# Altium PCB baseboard.PcbDoc
Units mil, origin at the board's own origin, x right, y up, seen from the top; angles counter-clockwise.
Board outline 3049.64 x 2909.31 mil, 2 copper layers (Top Layer, Bottom Layer); 26 components, 40 nets, 240 pads, 27 vias.
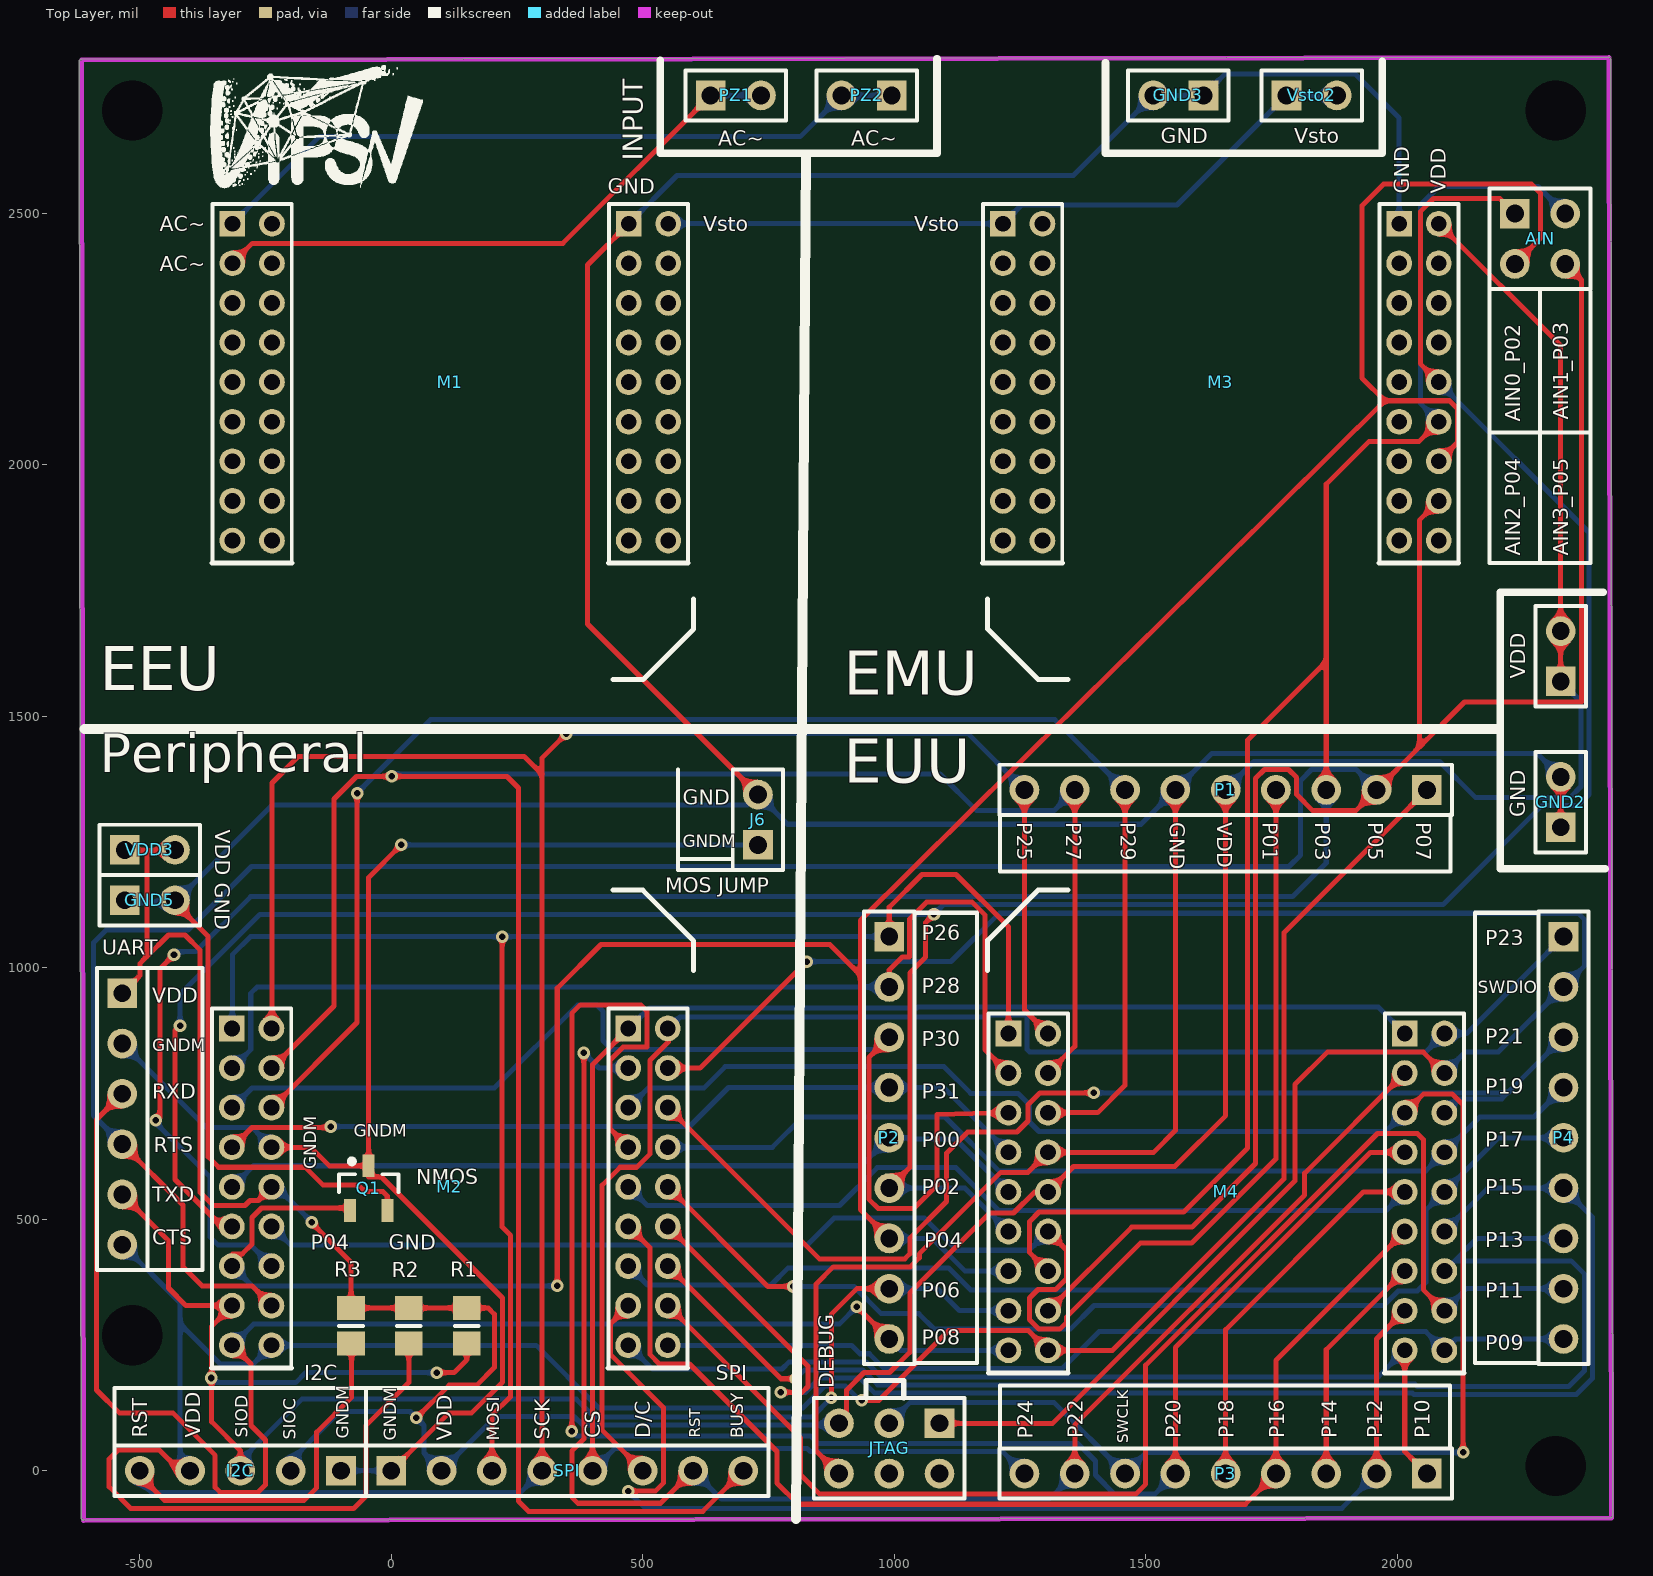
[diagram p0: Top Layer view]
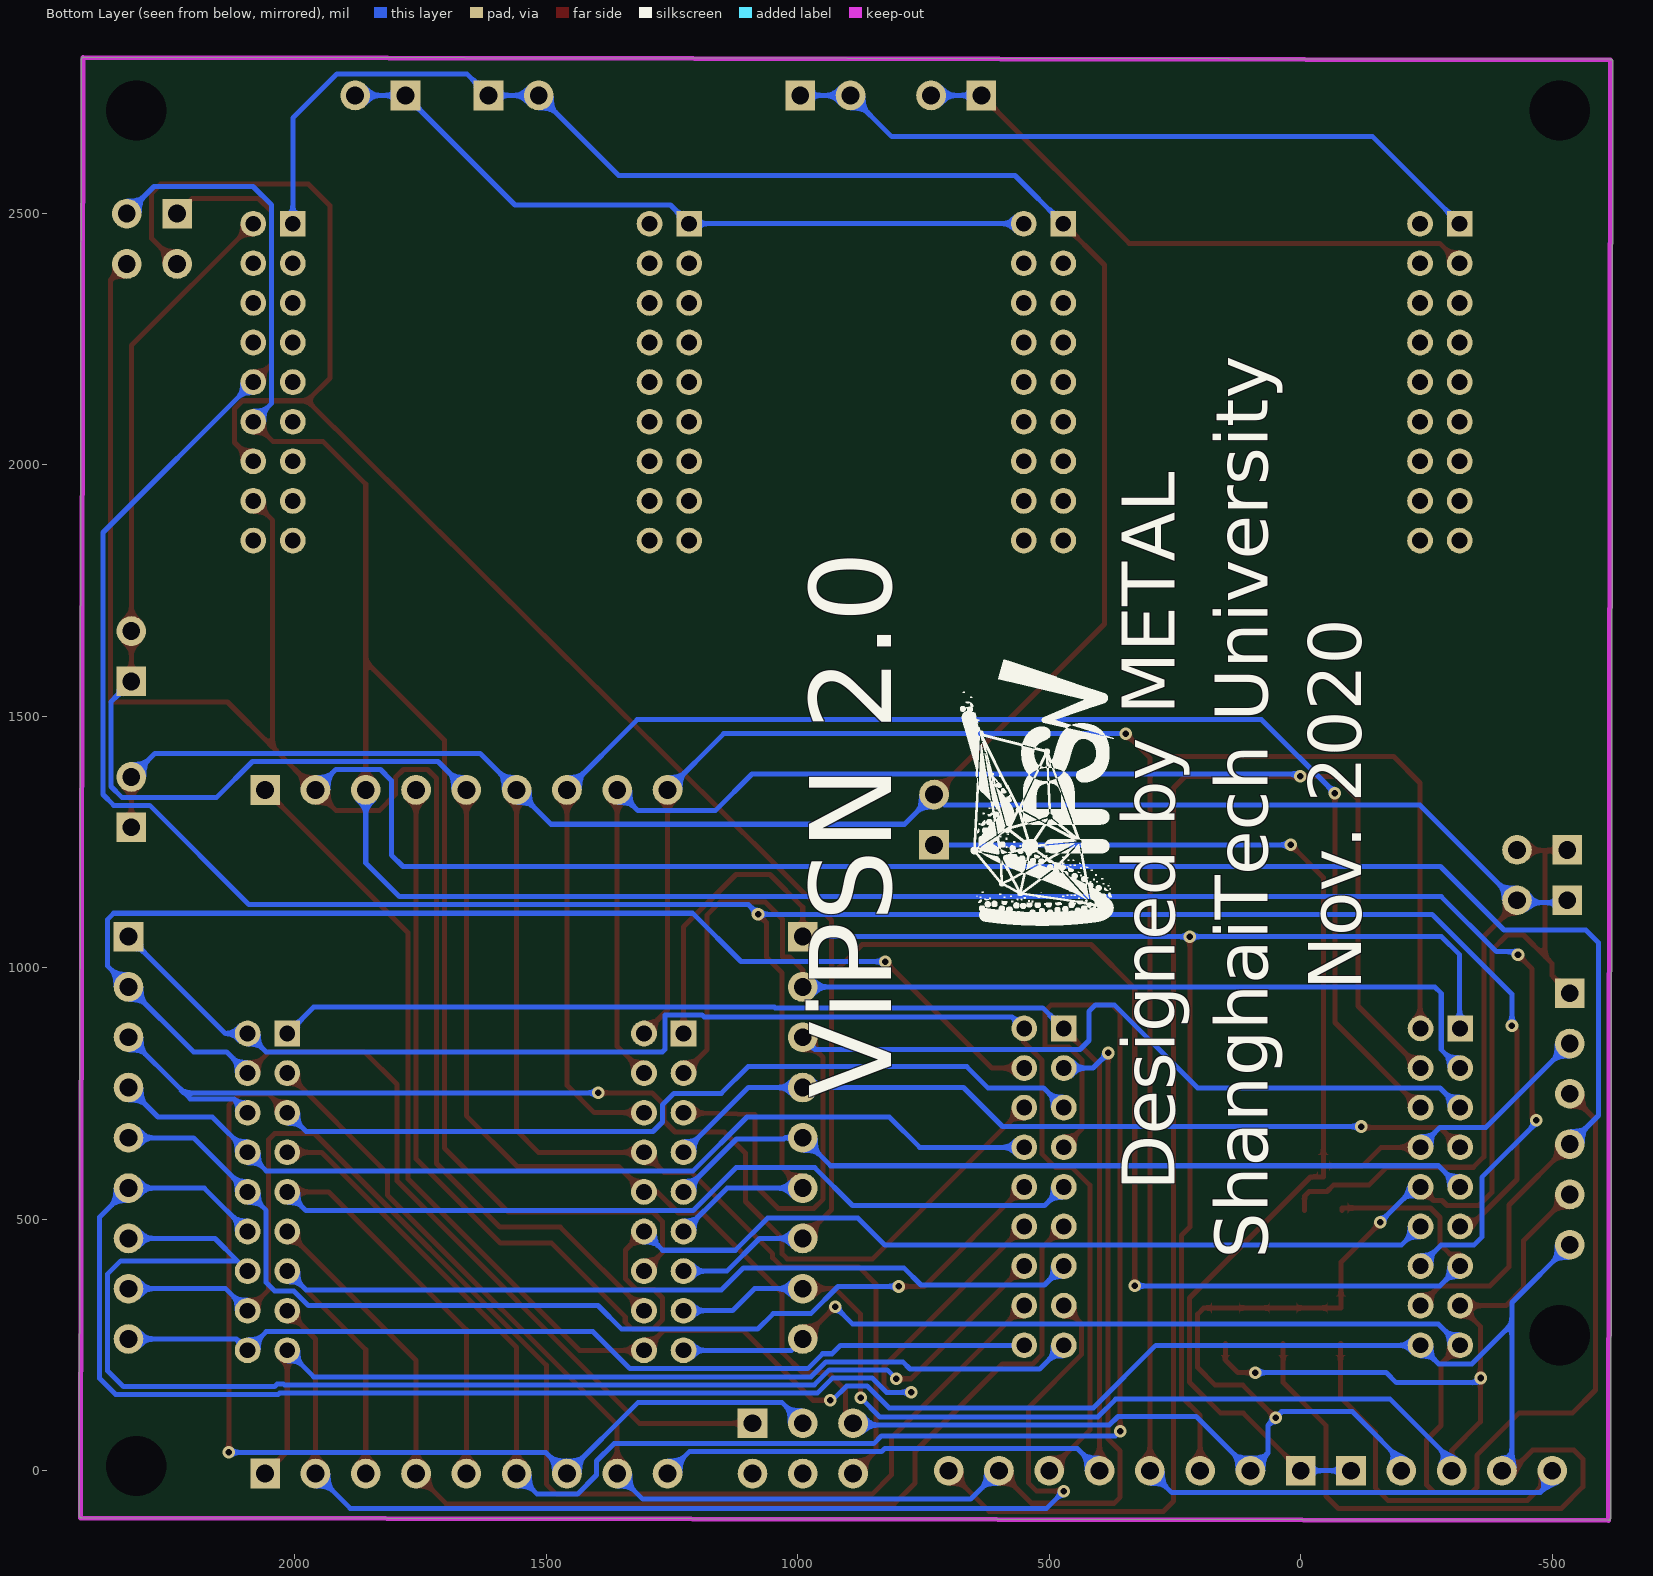
[diagram p1: Bottom Layer view, seen from below]

## Layer stack, top to bottom
Top Solder: solder mask 0.4, Solder Resist, Dk 3.5
Top Layer: signal copper 1.4
Dielectric 1: dielectric 12.6, FR-4, Dk 4.8
Bottom Layer: signal copper 1.4
Bottom Solder: solder mask 0.4, Solder Resist, Dk 3.5

## Board outline
-616.18,-93.75 -620.72,2799.24 cw(c-615.71,2799.25) -620.67,2800 cw(c-615.71,2800.77) -615.72,2805.78 2419.34,2810.56 cw(c2419.35,2805.54) 2424.37,2805.55 cw(c2419.35,2805.54) 2424.37,2805.54 2424.37,2805.55 2428.92,-88.96 cw(c2423.9,-88.97) 2428.92,-88.97 cw(c2423.9,-88.97) 2423.91,-93.99 -609.99,-98.76 cw(c-610,-93.74) -610.58,-98.73 cw(c-611.16,-93.74)

## Design rules (kind name [scope] priority, off if disabled: settings)
Clearance [All] p1: gap=6 ignorepadtopadclearanceinfootprint=FALSE
PolygonConnect [All] p1: connectstyle=Relief reliefconductorwidth=10 reliefentries=4 polygonreliefangle="90 Angle" airgapwidth=10
RoutingVias [All] p1: holewidth=13 width=25 viastyle="Through Hole" minholewidth=13 minwidth=25 maxholewidth=13 maxwidth=25
SolderMaskExpansion [All] p1: expansion=4
Width [All] p1: maxlimit=10 minlimit=10 preferedwidth=10
30 further rules are at their usual default settings.

## Components (designator, comment, footprint, x,y, rotation, side; value= is the part's Value field where it differs from the comment)
AIN "Header 2X2" HDR2X2 2233.94,2499.26 r270 top
GND2 "Header 2" HDR1X2 2325,1279.26 r90 top
GND3 "Header 2" HDR1X2 1615,2734.26 r180 top
GND5 "Header 2" HDR1X2 -530,1134.26 r0 top
I2C "Header 5" HDR1X5 -100,0 r180 top
J6 "Mos" HDR1X2 728.94,1244.26 r90 top
JTAG "Header 3X2" HDR2X3 1090,94.26 r180 top
M1 "MHDR2X18" module9x4 -315,1849.26 r0 top
M2 "MHDR2X18" module9x4 -316,249.26 r0 top
M3 "MHDR2X18" module9x4 1216.93,1849.26 r0 top
M4 "MHDR2X18" module9x4 1227.99,239.22 r0 top
P1 "Header 9" HDR1X9 2058.94,1353.52 r180 top
P2 "Header 9" HDR1X9 990.09,1061.82 r270 top
P3 "Header 9" HDR1X9 2058.94,-5.74 r180 top
P4 "Header 9" HDR1X9 2330.64,1061.82 r270 top
PZ1 "Header 2" HDR1X2 635,2734.26 r0 top
PZ2 "Header 2" HDR1X2 995,2734.26 r180 top
Q1 "mos" SOT23_N -45,561.82 r90 top
R1 "Res1" res 150,318.04 r270 top value=10k
R2 "Res1" res 35,318.04 r270 top value=10k
R3 "Res1" res -80,318.04 r270 top value=10k
SPI "Header 8" HDR1X8 0,0 r0 top
UART "MHDR1X6" HDR1X6 -535,949.26 r270 top
VDD "Header 2" HDR1X2 2325,1569.26 r90 top
VDD3 "Header 2" HDR1X2 -530,1234.26 r0 top
Vsto2 "Header 2" HDR1X2 1780,2734.26 r0 top

## Footprints (in the part's own frame and the unit in brackets; to place one, negate y for a bottom-side part, rotate by r counter-clockwise, add the part's x,y. Pads: shape width x height; smd on the part's side, far side on the other; paste and mask are expansions set on the pad)
HDR1X2 [mm] "Connector; Header; 2 Position"
  rect 1.5x1.5 hole 0.9: 1(0,0)
  round 1.5 hole 0.9: 2(2.54,0)
  silkscreen extent -1.27,-1.27 3.81,1.27
HDR1X5 [mm] "Connector; Header; 5 Position"
  rect 1.5x1.5 hole 0.9: 1(0,0)
  round 1.5 hole 0.9: 2(2.54,0) 3(5.08,0) 4(7.62,0) 5(10.16,0)
  silkscreen extent -1.27,-1.27 11.43,1.27
HDR1X6 [mm] "Connector; Header; 6 Position"
  rect 1.5x1.5 hole 0.9: 1(0,0)
  round 1.5 hole 0.9: 2(2.54,0) 3(5.08,0) 4(7.62,0) 5(10.16,0) 6(12.7,0)
  silkscreen extent -1.27,-1.27 13.97,1.27
HDR1X8 [mm] "Connector; Header; 8 Position"
  rect 1.5x1.5 hole 0.9: 1(0,0)
  round 1.5 hole 0.9: 2(2.54,0) 3(5.08,0) 4(7.62,0) 5(10.16,0) 6(12.7,0) 7(15.24,0) 8(17.78,0)
  silkscreen extent -1.27,-1.27 19.05,1.27
HDR1X9 [mm] "Connector; Header; 9 Position"
  rect 1.5x1.5 hole 0.9: 1(0,0)
  round 1.5 hole 0.9: 2(2.54,0) 3(5.08,0) 4(7.62,0) 5(10.16,0) 6(12.7,0) 7(15.24,0) 8(17.78,0) 9(20.32,0)
  silkscreen extent -1.27,-1.27 21.59,1.27
HDR2X2 [mm] "Connector; Header; 2x2 Position"
  rect 1.5x1.5 hole 0.9: 1(0,0)
  round 1.5 hole 0.9: 2(0,2.54) 3(2.54,0) 4(2.54,2.54)
  silkscreen extent -1.27,-1.27 3.81,3.81
HDR2X3 [mm] "Connector; Header; 3x2 Position"
  rect 1.5x1.5 hole 0.9: 1(0,0)
  round 1.5 hole 0.9: 2(0,2.54) 3(2.54,0) 4(2.54,2.54) 5(5.08,0) 6(5.08,2.54)
  silkscreen extent -1.27,-1.27 6.35,3.81
module9x4 [mm]
  rect 1.3x1.3 hole 0.8: 1(-0.025,16.002) 36(19.99,16.002)
  round 1.3 hole 0.8: 2(21.99,16.002) 3(-0.025,14.002) 4(21.99,14.002) 5(-0.025,12.002) 6(21.99,12.002) 7(-0.025,10.002) 8(21.99,10.002) 9(-0.025,8.002) 10(21.99,8.002) 11(-0.025,6.002) 12(21.99,6.002) 13(-0.025,4.002) 14(21.99,4.002) 15(-0.025,2.002) 16(21.99,2.002) 17(-0.025,0.002) 18(21.99,0.002) 19(1.975,0.002) 20(19.99,0.002) 21(1.975,2.002) 22(19.99,2.002) 23(1.975,4.002) 24(19.99,4.002) 25(1.975,6.002) 26(19.99,6.002) 27(1.975,8.002) 28(19.99,8.002) 29(1.975,10.002) 30(19.99,10.002) 31(1.975,12.002) 32(19.99,12.002) 33(1.975,14.002) 34(19.99,14.002) 35(1.975,16.002)
  silkscreen extent -1.04,-1.14 22.99,17
res [mm]
  rect 1.2x1.4 smd: 1(1.662,0) 2(-0.138,0)
  silkscreen extent 0.76,-0.6 0.76,0.6, body extent -0.31,-0.7 1.84,0.7, height 0.7
SOT23_N [mm] "SOT23, 3-Leads, Body 2.9x1.3mm, Pitch 0.95mm, Lead Span 2.3mm - Reverse Pinning, IPC Medium Density"
  rect 1.15x0.6 smd: 1(1.125,0) 2(-1.125,-0.95) 3(-1.125,0.95)
  silkscreen extent -0.2,-1.5 1.47,1.5, body extent -0.7,-1.5 0.7,1.5, height 1.1

## Part data
AIN: "Header, 2-Pin, Dual row", LatestRevisionDate=17-Jul-2002, LatestRevisionNote="Re-released for DXP Platform.", Publisher="Altium Limited"
GND2 GND3 GND5 PZ1 PZ2 VDD VDD3 Vsto2: "Header, 2-Pin", LatestRevisionDate=17-Jul-2002, LatestRevisionNote="Re-released for DXP Platform.", Publisher="Altium Limited"
I2C: "Header, 5-Pin", LatestRevisionDate=17-Jul-2002, LatestRevisionNote="Re-released for DXP Platform.", Publisher="Altium Limited"
J6: library part "Header 2", "Header, 2-Pin", LatestRevisionDate=17-Jul-2002, LatestRevisionNote="Re-released for DXP Platform.", Publisher="Altium Limited"
JTAG: "Header, 3-Pin, Dual row", LatestRevisionDate=17-Jul-2002, LatestRevisionNote="Re-released for DXP Platform.", Publisher="Altium Limited"
M1 M2 M3 M4: "Header, 18-Pin, Dual row", LatestRevisionDate=17-Jul-2002, LatestRevisionNote="Re-released for DXP Platform.", Publisher="Altium Limited"
P1 P2 P3 P4: "Header, 9-Pin", LatestRevisionDate=17-Jul-2002, LatestRevisionNote="Re-released for DXP Platform.", Publisher="Altium Limited"
Q1: library part MOSFET-N, "N-Channel MOSFET", LatestRevisionDate=17-Jul-2002, LatestRevisionNote="Re-released for DXP Platform.", PackageDescription="TO, Flat Index; 3 In-Line, Axial Leads; Body Dia. 4.6mm; Lead Dia. 0.5 mm (max)", PackageReference=E3, PackageVersion=1995/1996, Published=8-Jun-2000, Publisher="Altium Limited"
R1 R2 R3: "Resistor", LatestRevisionDate=17-Jul-2002, LatestRevisionNote="Re-released for DXP Platform.", PackageDescription="Axial Device, Thru-Hole; 2 Leads; 0.3 in Pin Spacing", PackageReference=AXIAL-0.3, Published=8-Jun-2000, Publisher="Altium Limited"
SPI: "Header, 8-Pin", LatestRevisionDate=17-Jul-2002, LatestRevisionNote="Re-released for DXP Platform.", Publisher="Altium Limited"
UART: "Header, 6-Pin", LatestRevisionDate=17-Jul-2002, LatestRevisionNote="Re-released for DXP Platform.", Publisher="Altium Limited"

## Free pads (board coordinates)
  round 60 hole 120: 0(-515,269.26) 0(-515,2704.26) 0(2315,9.26) 0(2315,2704.26)

## Via types
v1: diameter 25, hole 13, Top Layer to Bottom Layer, 27 vias

## Nets (pads, with @x,y where several pads share a name; then routed paths per layer and width w, separated by ;. In a path a pad name is that pad's centre, name@x,y a point inside that pad or via, vN(x,y) a via of type N, cw(c..) or ccw(c..) an arc to the next point about the centre after c; other vN are vias at no path point)
D: I2C.1 J6.1 M2.29 Q1.1 SPI.1 UART.2 | length 2933.8
  Top Layer w10: M2.29@-237.26,643 -160,643 -123.11,606.11 Q1.1 ; SPI.1 114.26,114.26 159.26,114.26 221,176 221,343.26 -19.59,583.85 -45,583.85 Q1.1 ; v1(20,1244.26) -45,1179.26 Q1.1
  Bottom Layer w10: UART.2 -368.48,682.74 -277,682.74 M2.29@-237.26,643 ; I2C.1@-120,0 SPI.1 ; v1(20,1244.26) J6.1
G: AIN.3 M2.13 M3.14 M4.13 P2.7 Q1.3 | length 5857.7
  Top Layer w10: M2.13@-316,406.78 -316,431.26 -296,431.26 -277,450.26 -277,503.26 -258,522.26 -82.4,522.26 Q1.3 ; v1(330,367.26) 330,959.26 417,1046.26 872,1046.26 933,985.26 ; P2.7 933,518.91 933,985.26 ; M3.14 2120,2044.14 2120,2111.26 2104,2127.26 1975,2127.26 ; AIN.3 2285,2450.32 2285,2540 2266.74,2558.26 1973.26,2558.26 1930,2515 1930,2172.26 1975,2127.26 ; 933,985.26 933,1094.26 1975,2127.26
  Bottom Layer w10: M2.13@-316,406.78 -276.48,367.26 v1(330,367.26) ; P2.7 1076,461.82 1141.04,396.78 M4.13
GND: GND2.1 GND2.2 GND3.1 GND3.2 GND5.1 GND5.2 J6.2 JTAG.6 M1.36 M3.36 M4.29 P1.6 Q1.2 | length 9226.9
  Top Layer w10: GND5.2@-431.06,1129.26 -364,1062.2 -364,624 -343.26,603.26 -171,603.26 -135.42,567.68 -64.76,567.68 -52.09,555 -16.75,555 -7.6,545.85 Q1.2 ; M1.36 390,2397.25 390,1683.2 J6.2 ; JTAG.6 844.47,39.79 844.47,370.73 879.03,405.29 1032,405.29 1049.88,423.17 1049.88,431.14 1212,593.26 1265.99,593.26 M4.29 1515.68,633 1558.94,676.26 P1.6 ; GND2.1 GND2.2
  Bottom Layer w10: GND5.1@-531.06,1129.26 -431.06,1129.26 -237.18,1323.14 707.82,1323.14 J6.2 787.94,1285.26 1490.68,1285.26 P1.6 1631.47,1426.05 2278.21,1426.05 GND2.2 ; M1.36 568.01,2575.26 1356,2575.26 GND3.2 GND3.1 1658,2777.26 1916,2777.26 2003.94,2689.32 M3.36
NFC1_P0.09: M2.18 M4.18 P4.9 | length 1854.3
  Bottom Layer w10: M2.18@550.75,249.3 915,249.3 931.8,232.5 950.42,232.5 980.21,202.71 1333.45,202.71 1407,276.26 2056.78,276.26 M4.18 2116.26,261.82 P4.9
NFC2_P0.10: M2.20 M4.20 P3.1 | length 1865.7
  Top Layer w10: M4.20 2015,38.2 P3.1
  Bottom Layer w10: M2.20@472.01,249.3 519.05,202.26 776.97,202.26 791.21,216.5 943.79,216.5 973.58,186.71 1962.41,186.71 M4.20
P0.02: AIN.1 M2.11 M3.10 M4.11 P2.6 | length 5853.9
  Top Layer w10: v1(-420,885) -430,875 -430,578.89 -336.67,485.56 M2.11 ; M2.11@-316.52,486.04 M2.11@-316,485.52 ; P2.6 1031,602.73 1031,989.67 1062.62,1021.29 1062.62,1089.88 v1(1079,1106.26) ; M3.10 2046,2200.98 2046,2503.26 2072,2529.26 2203.94,2529.26 AIN.1
  Bottom Layer w10: v1(-420,885) -420,947.26 -261,1106.26 v1(1079,1106.26) 1098,1125.26 2091,1125.26 2288.47,1322.73 2360,1322.73 2381.53,1344.26 2381.53,1865.45 M3.10 ; P2.6 1140.69,561.82 M4.11
P0.03: AIN.2 M2.23 M3.12 M4.23 P1.3 | length 6573.9
  Top Layer w10: v1(-468,697) -460,705 -460,997.82 v1(-432,1025.82) ; M4.23 1269.14,433.37 1269.14,495.4 1288,514.26 1575.43,514.26 1702.41,641.24 1702.41,1452.41 1858.94,1608.94 ; P1.3 1858.94,1608.94 ; M3.12 2043,2045.88 1943.62,2045.88 1858.94,1961.2 1858.94,1608.94
  Bottom Layer w10: v1@-472,695.26 -360,583.26 -360,464.26 -344,448.26 -278.74,448.26 M2.23@-237.26,406.78 ; v1(-432,1025.82) -425.78,1032.04 -388.87,1032.04 -279.65,1141.26 1792,1141.26 1858.94,1208.2 P1.3 ; M3.12 2046,2122.24 2046,2516.26 2083,2553.26 2279.94,2553.26 AIN.2
P0.05: AIN.4 M2.21 M3.16 M4.21 P1.2 UART.4 | length 7211.5
  Top Layer w10: UART.4 -414,528.26 -414,405.26 -376,367.26 -276.48,367.26 M2.21@-237.26,328.04 ; M4.21 1471.95,484.26 1592,484.26 1718.41,610.67 1718.41,1376.46 1736,1394.05 1784,1394.05 1800,1378.05 1800,1344.26 1832,1312.26 1917.68,1312.26 P1.2 2044,1438.58 ; M3.16 2044,1889.4 2044,1438.58 ; AIN.4 2366,2367.2 2366,1528.26 2133.68,1528.26 2044,1438.58
  Bottom Layer w10: UART.4 -592,706.26 -592,1049.82 -566.82,1075 -404.26,1075 -278,1201.26 1785,1201.26 1808,1224.26 1808,1372.26 1829.79,1394.05 1918.41,1394.05 P1.2
P0.06: I2C.3 M2.15 M4.15 P2.8 R1.1 UART.5 | length 3141.6
  Top Layer w10: UART.5 -443,457.26 -443,363.04 -408,328.04 -316,328.04 -357,287.04 -357,97 -300,40 I2C.3 ; v1(90,195) 125,195 150,220 R1.1 ; v1(875,145) 875,311.26 925.56,361.82 P2.8
  Bottom Layer w10: v1@-360,185 -350,175 -190,175 -170,195 v1(90,195) ; I2C.3@-320,0 -177.74,142.26 367.82,142.26 403.32,106.76 836.76,106.76 v1(875,145) ; P2.8 1086,361.82 1129.78,318.04 M4.15
  other v1: -358,184.26
P0.07: I2C.4 M2.19 M4.19 P1.1 R2.1 UART.6 | length 5025
  Top Layer w10: I2C.4@-420,0 -461.26,41.26 -543,41.26 -561,23.26 -561,-32 -518,-75 -74.79,-75 -50,-50.21 -50,90.26 35,175.26 R2.1 ; v1(935,140) 969.74,140 1108,278.26 1266.77,278.26 M4.19 1434,239.3 1775,580.3 1775,1069.58 P1.1
  Bottom Layer w10: UART.6 -420,334.26 -420,292.26 ; I2C.4@-420,0 -420,292.26 ; v1(935,140) 931.26,140 902.76,168.5 862.12,168.5 818.7,125.08 412.18,125.08 287.96,249.3 -237.26,249.3 -274.3,212.26 -340,212.26 -420,292.26
P0.08: M2.17 M4.17 P2.9 UART.3 | length 2989.3
  Top Layer w10: UART.3 -586,698.26 -586,160.26 -540,114.26 -433.68,114.26 -350,30.58 -350,-33 -340,-43 -265,-43 -250,-28 -250,61 -279,90 -279,212.3 M2.17@-316,249.3 ; v1(925.65,326.26) P2.9
  Bottom Layer w10: M2.17@-316,249.3 -274.04,291.26 890.65,291.26 v1(925.65,326.26) ; P2.9 1012.61,239.3 M4.17
P0.11: M2.16 M4.16 P4.8 | length 2752.5
  Top Layer w10: M2.16@550.75,328.04 814,64.79 814,-8.74 852,-46.74 1480,-46.74 1500,-26.74 1500,209.63 1960.63,670.26 2040,670.26 2052,658.26 2052,359.78 M4.16
  Bottom Layer w10: M4.16 2137.52,361.82 P4.8
P0.12: M2.22 M4.22 P3.2 | length 2365.9
  Top Layer w10: v1(471,-40.74) 525,-40.74 541,-24.74 541,125.68 435.42,231.26 435.42,291.45 M2.22@472.01,328.04 ; P3.2 1958.94,261.98 M4.22
  Bottom Layer w10: v1(471,-40.74) 505,-74.74 1889.94,-74.74 P3.2
P0.13: M2.14 M4.14 P4.7 | length 2674.4
  Top Layer w10: M2.14@550.75,406.78 774.77,182.76 v1(804.47,182.76)
  Bottom Layer w10: v1(804.47,182.76) 822.21,200.5 937.16,200.5 966.95,170.71 2020.82,170.71 2022.06,171.95 2035.31,171.95 2040,167.26 2341,167.26 2372,198.26 2372,391.26 2346,417.26 2114.22,417.26 ; M4.14 2114.22,417.26 ; P4.7 2158.78,461.82 2114.22,417.26
P0.14: M2.24 M4.24 P3.3 | length 2073.5
  Top Layer w10: P3.3 1858.94,240.72 M4.24
  Bottom Layer w10: M2.24@472.01,406.78 509.53,369.26 755,369.26 789,403.26 1108,403.26 1152,359.26 1977.48,359.26 M4.24
P0.15: M2.12 M4.12 P4.6 | length 2820.3
  Top Layer w10: M2.12@550.75,485.52 828.47,207.8 828.47,167.26 817.07,155.86 v1(774,155.86)
  Bottom Layer w10: v1(774,155.86) 823.7,155.86 852.34,184.5 930.53,184.5 960.33,154.71 2029.92,154.71 2033.37,151.26 2356,151.26 2388,183.26 2388,504.46 P4.6 2180.04,561.82 M4.12
P0.16: M2.26 M4.26 P3.4 | length 2289.5
  Top Layer w10: M2.26@472.01,485.52 514,443.53 514,231.26 533,212.26 593,212.26 767,38.26 767,-24.74 809,-66.74 1697.94,-66.74 P3.4 1758.94,219.46 M4.26
P0.17: M2.10 M4.10 P4.5 | length 2138.7
  Top Layer w10: M2.10@550.75,564.26 748.75,366.26 v1(799,366.26)
  Bottom Layer w10: v1(799,366.26) 920,366.26 974,312.26 1049,312.26 1080,281.26 1350,281.26 1397,328.26 1973,328.26 2002,357.26 2040,357.26 2057,374.26 2057,517.52 M4.10 2201.3,661.82 P4.5
P0.18: M2.28 M4.28 P3.5 | length 2395.7
  Top Layer w10: P3.5 1658.94,280.49 1932.71,554.26 M4.28
  Bottom Layer w10: M2.28@472.01,564.26 509.01,527.26 891,527.26 966.09,602.35 1122.91,602.35 1208,517.26 1978,517.26 M4.28
P0.19: M2.8 M4.8 P4.4 | length 1917.7
  Bottom Layer w10: M2.8@550.75,643 757.74,643 818,703.26 1101,703.26 1208,596.26 2057,596.26 M4.8 2164,703.26 2272.08,703.26 P4.4
P0.20: M2.30 M4.30 P3.6 | length 3489.7
  Top Layer w10: v1(359,78.26) 359,909.26 376,926.26 496,926.26 508.6,913.66 508.6,842.26 461,842.26 435,816.26 435,680.01 M2.30@472.01,643 ; P3.6 1558.94,244.83 1947.11,633 M4.30
  Bottom Layer w10: v1(359,78.26) 368,69.26 833.47,69.26 849,53.73 1365.53,53.73 1400,19.26 1400,-8.74 1438,-46.74 1517.94,-46.74 P3.6
P0.21: M2.6 M4.6 P4.3 | length 2322.7
  Top Layer w10: M2.6@550.75,721.74 851.2,421.29 1021.03,421.29 1031,431.26 1031,462.26 1104,535.26 1104,631.26 1146,673.26 1244,673.26 1266,695.26 1266,727.26 1290,751.26 v1(1397,751.26)
  Bottom Layer w10: v1(1397,751.26) 2220.08,751.26 ; M4.6 2121.26,739.26 2208.08,739.26 2220.08,751.26 ; P4.3 2220.08,751.26
P0.22: M2.34 M4.34 P3.8 SPI.7 | length 3138.9
  Top Layer w10: v1(383,830.48) 383,63.26 359,39.26 359,-52.74 371,-64.74 535.26,-64.74 SPI.7 ; P3.8 1358.94,91.2 1816,548.26 1816,591.48 M4.34
  Bottom Layer w10: v1(383,830.48) 413,800.48 M2.34@472.01,800.48 ; SPI.7 656.74,-56.74 1307.94,-56.74 P3.8
P0.23: M2.2 M4.2 P4.1 SPI.6 | length 2942.4
  Top Layer w10: SPI.6 419.42,80.58 419.42,567.68 455,603.26 488,603.26 514,629.26 514,815.48 550.75,852.23 M2.2@550.75,879.22
  Bottom Layer w10: M2.2@550.75,879.22 573.88,902.35 1186.54,902.35 1190,905.81 1264,905.81 1264,837.63 1269,832.63 2057.15,832.63 M4.2 2138.04,869.22 P4.1
P0.24: M2.36 M4.36 P3.9 SPI.5 | length 3389.4
  Top Layer w10: SPI.5 400,807.21 M2.36@472.01,879.22
  Bottom Layer w10: SPI.5 444.26,44.26 826.94,44.26 833.47,37.73 1215.47,37.73 P3.9 ; M2.36@472.01,879.22 513.05,920.26 1045.07,920.26 1046.62,921.81 1962.41,921.81 M4.36
P0.25: I2C.5 M2.35 M4.35 P1.9 R3.1 SPI.4 | length 5573.1
  Top Layer w10: I2C.5 -500,-10 -451,-59 -173.26,-59 -148.37,-34.11 -148.37,76.63 -79,146 -79,252.61 R3.1 ; M2.35@-237.26,879.22 -237.26,1367.26 -184.26,1420.26 264,1420.26 300,1384.26 ; SPI.4 300,1384.26 ; v1(348,1465.26) 300,1417.26 300,1384.26 ; P1.9 1258.94,916.01 M4.35
  Bottom Layer w10: I2C.5@-520,0 -476.26,-43.74 256.26,-43.74 SPI.4 ; v1(348,1465.26) 1147.2,1465.26 P1.9
P0.26: M2.1 M4.1 P2.1 SPI.3 | length 3128.9
  Top Layer w10: SPI.3 200,110 237,147 237,468 220.56,484.44 v1(220.56,1061.82) ; P2.1 990.09,1120.26 1055.09,1185.26 1123,1185.26 1226.99,1081.27 M4.1
  Bottom Layer w10: M2.1@-316,879.22 -316,1025.82 -280,1061.82 v1(220.56,1061.82) P2.1
P0.27: M2.33 M4.33 P1.8 SPI.8 | length 4880.1
  Top Layer w10: M2.33@-237.26,800.48 -114,923.74 -114,1335.26 -69,1380.26 v1(1,1380.26) 230,1380.26 253,1357.26 253,-60.74 273,-80.74 619.26,-80.74 SPI.8 ; M4.33 1358.94,843.69 P1.8
  Bottom Layer w10: v1(1,1380.26) 6,1385.26 1091,1385.26 1164,1312.26 1317.68,1312.26 P1.8
P0.28: M2.3 M4.3 P2.2 | length 2106.7
  Top Layer w10: P2.2 990.09,995.39 1016,1021.29 1030.62,1021.29 1030.62,1096.88 1064,1130.26 1155,1130.26 1180,1105.26 1180,837.47 M4.3
  Bottom Layer w10: M2.3@-316,800.48 -279.41,837.07 -279.41,949.07 -266.66,961.82 P2.2
P0.29: M2.31 M4.31 P1.7 | length 3104
  Top Layer w10: M2.31@-237.26,721.74 -68,891 v1(-68,1347.26) ; M4.31 1404.48,711.74 1458.94,766.2 P1.7
  Bottom Layer w10: v1(-68,1347.26) 78,1493.26 1319.2,1493.26 P1.7
P0.30: M2.5 M4.5 P2.3 | length 2255.8
  Top Layer w10: P2.3 949.57,821.29 949.57,539.73 968,521.29 1039.03,521.29 1085,567.26 1085,708.26 M4.5
  Bottom Layer w10: M2.5@-316,721.74 -277,760.74 205.02,760.74 370.5,926.22 408,926.22 421.04,913.18 421.04,855.26 439.04,837.26 965.53,837.26 P2.3
P0.31: M2.7 M4.7 P2.4 | length 1645.6
  Top Layer w10: M2.7@-316,643 -276.74,682.26 -122,682.26 v1(-120,684.26)
  Bottom Layer w10: v1(-120,684.26) 593,684.26 670.56,761.82 P2.4 1098.17,761.82 M4.7
PZ1: M1.3 PZ1.1 PZ1.2 | length 1189.2
  Top Layer w10: M1.3 -276.26,2440.26 341,2440.26 PZ1.1
  Bottom Layer w10: PZ1.1 PZ1.2
PZ2: M1.1 PZ2.1 PZ2.2 | length 1416.6
  Bottom Layer w10: M1.1 -143,2652.26 813,2652.26 PZ2.2 PZ2.1
SWCLK: JTAG.3 M2.32 M4.32 P3.7 | length 3731.1
  Top Layer w10: M4.32 2052.52,749.26 2109,749.26 2131,727.26 v1(2131,36.26)
  Bottom Layer w10: M2.32@472.01,721.74 511.53,761.26 622,761.26 664,803.26 1099,803.26 1152,750.26 1246,750.26 1269,727.26 1269,693.26 1288,674.26 1977.52,674.26 M4.32 ; JTAG.3 1031,135.26 1317.94,135.26 P3.7 1500.94,36.26 v1(2131,36.26)
SWDIO: JTAG.1 M2.4 M4.4 P4.2 | length 3852.3
  Top Layer w10: M2.4@550.75,800.48 614.22,800.48 v1(826,1012.26) ; JTAG.1 1315,94.26 1796.55,575.81 1796.55,767.81 1860.96,832.22 2052,832.22 M4.4
  Bottom Layer w10: v1(826,1012.26) 1113,1012.26 1209,1108.26 2360,1108.26 2372,1096.26 2372,1003.18 P4.2 2201.08,832.26 2135.52,832.26 M4.4
VDD: I2C.2 JTAG.5 M2.27 M3.2 M4.27 P1.5 R1.2 R2.2 R3.2 SPI.2 UART.1 VDD3.1 VDD3.2 VDD.1 VDD.2 | length 7158.3
  Top Layer w10: UART.1 -500,984.26 -500,1008 -486,1022 ; VDD3.1@-530,1233.2 -490,1233.2 ; VDD3.2@-430,1233.2 -490,1233.2 ; M2.27@-237.26,564.26 -264.26,537.26 -281,537.26 -291,527.26 -354,527.26 -380,553.26 -380,1035 -410,1065 -443,1065 -486,1022 ; v1@-155,490 -155,489.44 -80,414.44 R3.2 R2.2 R1.2 192.79,323.47 205,311.26 205,205 170,170 115,170 v1(50,105) ; JTAG.5 905,109.26 905,160 940,195 990.74,195 1031,235.26 1031,353.26 1190,512.26 1237.29,512.26 1279.29,554.26 M4.27 1356.28,604.81 1557.79,604.81 1658.94,705.95 P1.5 ; M3.2 2325,2236.94 VDD.2 VDD.1 ; -490,1233.2 -486,1229.2 -486,1022
  Bottom Layer w10: M2.27 -228.04,564.3 v1(-158,494.26) ; I2C.2@-220,0 -102.74,117.26 37.74,117.26 v1(50,105) 65,90 65,35 SPI.2 207.91,107.91 363.35,107.91 380.5,90.76 886.5,90.76 JTAG.5 ; P1.5 1715.47,1410.05 2084,1410.05 2155.32,1338.73 2344,1338.73 2365.53,1360.26 2365.53,1528.73 VDD.1
Vsto: M1.2 M3.1 Vsto2.1 Vsto2.2 | length 1434.9
  Bottom Layer w10: M1.2 M3.1 1252.93,2516.26 1562,2516.26 Vsto2.1 Vsto2.2
XL1_P0.00: M2.9 M4.9 P2.5 | length 1628
  Bottom Layer w10: M2.9@-316,564.26 -274,606.26 934.53,606.26 P2.5 1025.48,661.82 1027.71,659.59 1121.66,659.59 M4.9
XL2_P0.01: M2.25 M4.25 P1.4 | length 3241.9
  Top Layer w10: M4.25 1342.32,438.93 1342.32,381.62 1320.89,360.19 1285.93,360.19 1269,343.26 1269,300.26 1288,281.26 1329,281.26 1343,295.26 1343,305.96 1489.3,452.26 1591,452.26 1758.94,620.2 P1.4
  Bottom Layer w10: M2.25@-237.26,485.52 -200,448.26 826.37,448.26 880.46,502.35 1059.91,502.35 1124,438.26 1268.47,438.26 M4.25
pads on no net: JTAG.2 JTAG.4 M1.4 M1.5 M1.6 M1.7 M1.8 M1.9 M1.10 M1.11 M1.12 M1.13 M1.14 M1.15 M1.16 M1.17 M1.18 M1.19 M1.20 M1.21 M1.22 M1.23 M1.24 M1.25 M1.26 M1.27 M1.28 M1.29 M1.30 M1.31 M1.32 M1.33 M1.34 M1.35 M3.3 M3.4 M3.5 M3.6 M3.7 M3.8 M3.9 M3.11 M3.13 M3.15 M3.17 M3.18 M3.19 M3.20 M3.21 M3.22 M3.23 M3.24 M3.25 M3.26 M3.27 M3.28 M3.29 M3.30 M3.31 M3.32 M3.33 M3.34 M3.35

## Keep-outs
Keep-Out Layer:
  lines w10: -616.15,2804.94 -611.58,-99 2425.72,-94.22 2421.15,2809.72 -616.15,2804.94

## Silkscreen, mask and mechanical layers (free items; w line width, h text height)
Top Overlay:
  drawing of 3667 lines, arcs and shapes, not listed
  text "GND" at 1530,2639.26 h30
  text "Vsto" at 1795,2639.26 h30
  text "AC~" at 650,2634.26 h30
  text "AC~" at 915,2634.26 h30
  text "INPUT" at 500,2604.26 h40 r90
  text "GND" at 430,2539.26 h30
  text "GND" at 2023.94,2539.26 h30 r90
  text "VDD" at 2096.06,2539.26 h30 r90
  text "AC~" at -460,2464.26 h30
  text "Vsto" at 620,2464.26 h30
  text "Vsto" at 1040,2464.26 h30
  text "AC~" at -460,2384.26 h30
  text "AIN1_P03" at 2340,2089.26 h30 r90
  text "AIN0_P02" at 2245,2085.56 h30 r90
  text "AIN2_P04" at 2245,1819.26 h30 r90
  text "AIN3_P05" at 2340,1819.26 h30 r90
  text "EEU" at -580,1522.47 h150
  text "EMU" at 900,1514.26 h150
  text "Peripheral" at -580,1364.26 h130
  text "EUU" at 900,1339.26 h150
  text "GND" at 580,1324.26 h30
  text "GND" at 2255,1299.26 h30 r90
  text "P25" at 1245,1289.26 h30 r270
  text "P27" at 1342.48,1289.26 h30 r270
  text "P29" at 1450,1289.26 h30 r270
  text "GND" at 1547.48,1289.26 h30 r270
  text "VDD" at 1642.48,1289.26 h30 r270
  text "P01" at 1732.48,1289.26 h30 r270
  text "P03" at 1837.48,1289.26 h30 r270
  text "P05" at 1942.48,1289.26 h30 r270
  text "P07" at 2037.48,1289.26 h30 r270
  text "VDD" at -350,1274.26 h30 r270
  text "GNDM" at 580,1239.26 h25
  text "GND" at -351.06,1169.26 h30 r270
  text "MOS JUMP" at 545,1149.26 h30
  text "P26" at 1055,1054.26 h30
  text "P23" at 2175,1044.26 h30
  text "P28" at 1055,949.26 h30
  text "SWDIO" at 2160,949.26 h25
  text "VDD" at -475,930 h30
  text "P21" at 2175,849.26 h30
  text "P30" at 1055,844.26 h30
  text "GNDM" at -475,834.26 h25
  text "P19" at 2175,749.26 h30
  text "RXD" at -475,739.26 h30
  text "P31" at 1055,739.26 h30
  text "GNDM" at -75,664.26 h25
  text "P17" at 2175,644.26 h30
  text "P00" at 1055,643 h30
  text "RTS" at -472,633 h30
  text "GNDM" at -149.26,599.26 h25 r90
  text "NMOS" at 50,569.26 h30
  text "P02" at 1055,549.93 h30
  text "P15" at 2175,549.26 h30
  text "TXD" at -475,534.26 h30
  text "CTS" at -475,449.26 h30
  text "P13" at 2175,444.26 h30
  text "P04" at 1060,443.26 h30
  text "P04" at -160,439.26 h30
  text "GND" at -5,439.26 h30
  text "P06" at 1055,344.26 h30
  text "P11" at 2175,344.26 h30
  text "P08" at 1055,249.93 h30
  text "P09" at 2175,239.3 h30
  text "I2C" at -173.26,180 h30
  text "SPI" at 645,180 h30
  text "DEBUG" at 880,164.26 h30 r90
  text "RST" at -485,65 h30 r90
  text "VDD" at -380,65 h30 r90
  text "SIOD" at -285,65 h25 r90
  text "RST" at 614.22,65 h22 r90
  text "CS" at 415,64.26 h30 r90
  text "D/C" at 515,64.26 h30 r90
  text "BUSY" at 700,64.26 h25 r90
  text "P22" at 1375,64.26 h30 r90
  text "P20" at 1570,64.26 h30 r90
  text "P18" at 1675,64.26 h30 r90
  text "P16" at 1775,64.26 h30 r90
  text "P14" at 1880,64.26 h30 r90
  text "P12" at 1970,64.26 h30 r90
  text "P10" at 2065,64.26 h30 r90
  text "GNDM" at -85,63.26 h25 r90
  text "P24" at 1275,63.26 h30 r90
  text "SIOC" at -190,61 h25 r90
  text "SCK" at 315,61 h30 r90
  text "GNDM" at 10,60 h25 r90
  text "MOSI" at 215,60 h25 r90
  text "VDD" at 120,59.26 h30 r90
  text "SWCLK" at 1465,54.73 h22 r90
Bottom Overlay:
  drawing of 3608 lines, arcs and shapes, not listed
  text "Nov. 2020" at -155,955 h180 r270
  text "ViPSN 2.0" at 760,740 h280 r270
  text "Designed by METAL" at 215.5,556.59 h180 r270
  text "ShanghaiTech University" at 30.5,421.59 h180 r270